# Altium PCB ToF_Sensor.PcbDoc
Units mm, origin at the board's own origin, x right, y up, seen from the top; angles counter-clockwise.
Board outline 10.8 x 10.2 mm, 2 copper layers (Top Layer, Bottom Layer); 15 components, 9 nets, 57 pads, 24 vias.
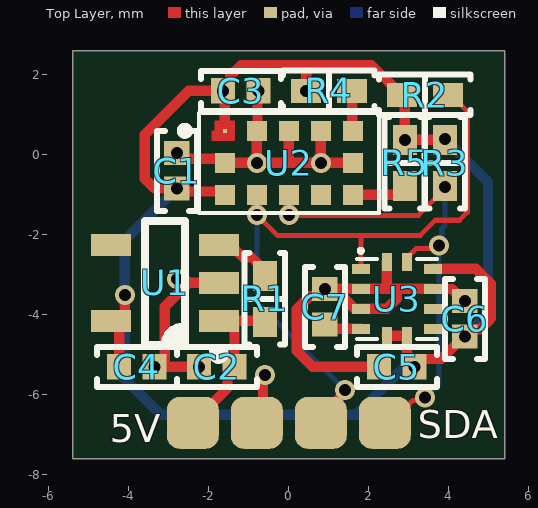
[diagram p0: Top Layer view]
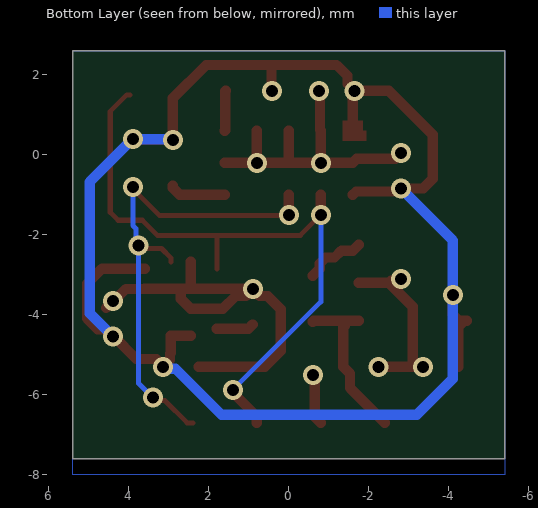
[diagram p1: Bottom Layer view, seen from below]

## Layer stack, top to bottom
Top Solder: solder mask 0.0102, Solder Resist, Dk 3.5
Top Layer: signal copper 0.0356
Dielectric 1: dielectric 0.32, FR-4, Dk 4.8
Bottom Layer: signal copper 0.0356
Bottom Solder: solder mask 0.0102, Solder Resist, Dk 3.5

## Board outline
-5.4,-7.6 -5.4,2.6 5.4,2.6 5.4,-7.6

## Design rules (kind name [scope] priority, off if disabled: settings)
BoardOutlineClearance [All] p1: gap=0.2 ignorepadtopadclearanceinfootprint=FALSE
Clearance "PolyGon Pour Clearance" [InPolygon] p1: gap=0.2 ignorepadtopadclearanceinfootprint=FALSE
Clearance [All] p2: gap=0.2 ignorepadtopadclearanceinfootprint=TRUE except(0: Arc-Hole Track-Hole SMDPad-Hole THPad-Hole Via-Hole Fill-Hole Poly-Hole Region-Hole Text-Hole)
HoleSize [All] p1: absolutevalues=TRUE maxlimit=6.3 minlimit=0.02 maxpercent=80.000 minpercent=20.000
PolygonConnect PolygonRelief [IsPolygon and not (IsNamedPolygon('PolygonDirect'))] p1: thpad.connectstyle=Relief thpad.reliefconductorwidth=0.254 thpad.reliefentries=4 thpad.polygonreliefangle="90 Angle" thpad.airgapwidth=0.254 smdpad.connectstyle=Relief smdpad.reliefconductorwidth=0.254 smdpad.reliefentries=4 smdpad.polygonreliefangle="90 Angle" smdpad.airgapwidth=0.254 via.connectstyle=Direct via.reliefconductorwidth=0.254 via.reliefentries=4 via.polygonreliefangle="90 Angle" via.airgapwidth=0.254
PolygonConnect [All] p2: connectstyle=Direct reliefconductorwidth=0.254 reliefentries=4 polygonreliefangle="90 Angle" airgapwidth=0.254
RoutingVias [All] p1: holewidth=0.3 width=0.5 viastyle="Through Hole" minholewidth=0.3 minwidth=0.5 maxholewidth=0.7 maxwidth=1.27
SolderMaskExpansion [All] p1: expansion=0.102 istentingtop=FALSE
Width [All] p1: maxlimit=0.712 minlimit=0.127 preferedwidth=0.254
29 further rules are at their usual default settings.

## Components (designator, comment, footprint, x,y, rotation, side; value= is the part's Value field where it differs from the comment)
C1 "0.1 µF" "CAP 0402_1005" -2.8,-0.4 r270 top
C2 "0.1 µF" "CAP 0402_1005" -1.8,-5.3 r0 top
C3 "0.1 µF" "CAP 0402_1005" -1.2,1.6 r180 top
C4 "1 µF" "CAP 0402_1005" -3.8,-5.3 r180 top
C5 "1 µF" "CAP 0402_1005" 2.7,-5.3 r180 top
C6 "0.1 µF" "CAP 0402_1005" 4.4,-4.1 r90 top
C7 "0.1 µF" "CAP 0402_1005" 0.9,-3.8 r90 top
R1 "10k Ohms" "RES 0402_1005" -0.6,-3.6 r270 top
R2 "10k" "RES 0402_1005" 3.4,1.5 r0 top
R3 "10k" "RES 0402_1005" 3.9,-0.2 r270 top
R4 "10k" "RES 0402_1005" 1,1.6 r0 top
R5 "10k" "RES 0402_1005" 2.9,-0.2 r270 top
U1 "MIC5504" "TI SOT-23-5 DBV" -3.1,-3.2 r180 top
U2 "VL53L3CXV0DH/1" XDCR_VL53L3CXV0DH/1 0,-0.2 r0 top
U3 "LIS3MDL" LGA12_ST 2.7,-3.6 r0 top

## Footprints (in the part's own frame and the unit in brackets; to place one, negate y for a bottom-side part, rotate by r counter-clockwise, add the part's x,y. Pads: shape width x height; smd on the part's side, far side on the other; paste and mask are expansions set on the pad)
"CAP 0402_1005" [mm] "Chip Capacitor, 2-Leads, Body 1.02x0.51mm, IPC Medium Density"
  rect 0.6x0.64 smd: 1(-0.44,0) 2(0.44,0)
  silkscreen extent -1,-0.5 1,0.5, body extent -0.5,-0.26 0.5,0.26, height 0.52
LGA12_ST [mm]
  rect 0.45x0.25 smd: 1(-0.9,0.75) 2(-0.9,0.25) 3(-0.9,-0.25) 4(-0.9,-0.75) 7(0.9,-0.75) 8(0.9,-0.25) 9(0.9,0.25) 10(0.9,0.75)
  rect 0.25x0.45 smd: 5(-0.25,-0.925) 6(0.25,-0.925) 11(0.25,0.925) 12(-0.25,0.925)
  silkscreen extent -1,-1 1,1.25, body extent -1,-1 1,1, height 0.25
"RES 0402_1005" [mm] "Chip Resistor, 2-Leads, Body 1.0x0.5mm, IPC Medium Density"
  rect 0.75x0.6 smd: 1(-0.575,0) 2(0.575,0)
  silkscreen extent -1.14,-0.51 1.14,0.51, body extent -0.5,-0.25 0.5,0.25, height 0.35
"TI SOT-23-5 DBV" [mm] "SOT23, 5-Leads, Body 2.90x2.80mm, Pitch 0.95mm, IPC Medium Density"
  rect 1x0.55 smd: 1(-1.35,0.95) 2(-1.35,0) 3(-1.35,-0.95) 4(1.35,-0.95) 5(1.35,0.95)
  silkscreen extent -1.48,-1.55 0.5,1.9, body extent -1.44,-1.43 1.39,1.48, height 1.5
XDCR_VL53L3CXV0DH/1 [mm]
  rect 0.1x0.1 smd paste-1 mask+0: 1(-1.6,0.8)
  rect 0.5x0.5 smd: 2(-0.8,0.8) 3(0,0.8) 4(0.8,0.8) 5(1.6,0.8) 6(1.6,0) 7(1.6,-0.8) 8(0.8,-0.8) 9(0,-0.8) 10(-0.8,-0.8) 11(-1.6,-0.8) 12(-1.6,0)
  Top Layer region: -1.35,0.55 -1.93,0.55 -1.93,0.8 -1.85,0.8 -1.85,1.05 -1.35,1.05
  silkscreen extent -2.7,-1.25 2.25,1.25, body extent -2.2,-1.2 2.2,1.2, height 1.05

## Part data
C1 C2 C3 C6 C7: library part C0402C104K4RACAUTO, "CAP CER 0.1UF 16V X7R 0402", Device Package="0402 (1005 Metric)", Manufacturer=KEMET, Operating Temperature="-55°C ~ 125°C", Ratings=AEC-Q200, Supplier Part Number 1=399-6828-1-ND, Temperature Coefficient=X7R, Tolerance=±10%, Voltage - Rated=16V, Applications="Automotive, Bypass, Decoupling", Capacitance="0.1 µF", ComponentLink1Description=Datasheet, ComponentLink1URL=https://api.kemet.com/component-edge/download/specsheet/C0402C104K4RACAUTO.pdf, ComponentLink2Description="DigiKey Link", ComponentLink2URL=https://www.digikey.com/en/products/detail/kemet/C0402C104K4RACAUTO/3314827, LastUpdated="8/14/2022 9:05:51 PM", Lifecycle Status=Active, Minimum Order=1, Mounting Type="Surface Mount, MLCC", Package / Case="0402 (1005 Metric)", Packaging=TapeAndReel, Part Number=C0402C104K4RACAUTO, Part Status=Active, PartId=3024, Price=0.01, Series="SMD Auto X7R", Size / Dimension="0.039\" L x 0.020\" W (1.00mm x 0.50mm)", Supplier 1=DigiKey, Thickness (Max)="0.022\" (0.55mm)"
C4 C5: library part C0402C104K4RACAUTO, "CAP CER 0.1UF 16V X7R 0402", Capacitance="0.1 µF", Device Package="0402 (1005 Metric)", Manufacturer=KEMET, Operating Temperature="-55°C ~ 125°C", Ratings=AEC-Q200, Supplier Part Number 1=399-6828-1-ND, Temperature Coefficient=X7R, Tolerance=±10%, Voltage - Rated=16V, Applications="Automotive, Bypass, Decoupling", ComponentLink1Description=Datasheet, ComponentLink1URL=https://api.kemet.com/component-edge/download/specsheet/C0402C104K4RACAUTO.pdf, ComponentLink2Description="DigiKey Link", ComponentLink2URL=https://www.digikey.com/en/products/detail/kemet/C0402C104K4RACAUTO/3314827, LastUpdated="8/14/2022 9:05:51 PM", Lifecycle Status=Active, Minimum Order=1, Mounting Type="Surface Mount, MLCC", Package / Case="0402 (1005 Metric)", Packaging=TapeAndReel, Part Number=C0402C104K4RACAUTO, Part Status=Active, PartId=3024, Price=0.01, Series="SMD Auto X7R", Size / Dimension="0.039\" L x 0.020\" W (1.00mm x 0.50mm)", Supplier 1=DigiKey, Thickness (Max)="0.022\" (0.55mm)"
R1 R2 R3 R4 R5: library part CRCW0402330RJNEDC, "RES 330 OHM 5% 1/16W 0402", Device Package="0402 (1005 Metric)", Manufacturer="Vishay Dale", Operating Temperature="-55°C ~ 155°C", Power (Watts)="0.063W, 1/16W", Resistance="330 Ohms", Supplier Device Package=0402, Supplier Part Number 1=541-4123-1-ND, Temperature Coefficient=±200ppm/°C, Tolerance=±5%, ComponentLink1Description=Datasheet, ComponentLink1URL=http://www.vishay.com/docs/28773/crcwce3.pdf, ComponentLink2Description="DigiKey Link", ComponentLink2URL=https://www.digikey.com/en/products/detail/vishay-dale/CRCW0402330RJNEDC/7928545, Composition="Thick Film", Height - Seated (Max)="0.014\" (0.35mm)", LastUpdated="8/14/2022 9:23:31 PM", Lifecycle Status=Active, Minimum Order=1, Number of Terminations=2, Package / Case="0402 (1005 Metric)", Packaging=CutTape, Part Number=CRCW0402330RJNEDC, Part Status=Active, PartId=15989, Price=0.01, Series=CRCW-C, Size / Dimension="0.039\" L x 0.020\" W (1.00mm x 0.50mm)", Supplier 1=DigiKey
U1: library part MIC5504-3.3YM5, "3.3V LDO"
U2: "Optical Sensor 118.110 (3m) I2C Output", Package=None, Availability=Unavailable, MF=STMicroelectronics, MP=VL53L3CXV0DH/1, Price=None, SnapEDA_Link=https://www.snapeda.com/parts/VL53L3CXV0DH/1/STMicroelectronics/view-part/4775788/?ref=snap
U3: "Magnetometer"

## Free pads (board coordinates)
  rrect50% 1.3x1.3 smd: 1(-2.4,-6.7) 2(-0.8,-6.7) 3(0.8,-6.7) 4(2.4,-6.7)

## Via types
v1: diameter 0.5, hole 0.3, Top Layer to Bottom Layer, tented both sides, 24 vias

## Nets (pads, with @x,y where several pads share a name; then routed paths per layer and width w, separated by ;. In a path a pad name is that pad's centre, name@x,y a point inside that pad or via, vN(x,y) a via of type N, cw(c..) or ccw(c..) an arc to the next point about the centre after c; other vN are vias at no path point)
3V3: C1.2 C3.2 C4.2 C5.1 C6.1 R2.1 R3.1 R4.1 R5.1 U1.5 U2.1 U2.11 U3.5 U3.6 U3.10 | length 43.1
  Top Layer w0.254: U1.5 U1.5@-4.388,-4.15 ; C4.2 -4.24,-4.298 U1.5@-4.388,-4.15 ; v1(-4.1,-3.5) -4.1,-4.002 -4.248,-4.15 U1.5@-4.388,-4.15 ; U2.11 -1.68,-0.92 -2.72,-0.92 v1(-2.8,-0.84) -3.36,-0.84 -3.6,-0.6 -3.6,0.5 -2.5,1.6 v1(-1.64,1.6) ; U2.1 -1.6,1.56 v1(-1.64,1.6) ; v1(0.425,1.6) 0.435,1.61 0.435,2.247 ; U3.5 U3.6 2.95,-4.958 2.967,-4.975 2.967,-5.127 v1(3.14,-5.3) 3.14,-5.28 3.313,-5.107 3.813,-5.107 4.38,-4.54 v1(4.4,-4.54) ; U3.10@3.602,-2.852 U3.10 4.672,-2.85 5.047,-3.225 5.047,-4.095 4.775,-4.367 4.573,-4.367 v1(4.4,-4.54) ; R3.1 v1(2.9,0.375) 2.9,1.412 2.065,2.247 0.435,2.247 ; C6.1@4.408,-4.548 v1(4.4,-4.54) ; v1(-1.64,1.6) -1.467,1.773 -1.467,1.975 -1.195,2.247 0.435,2.247
  Bottom Layer w0.254: v1(-2.8,-0.84) -4.1,-2.14 v1(-4.1,-3.5) -4.1,-5.6 -3.2,-6.5 1.681,-6.5 2.833,-5.347 3.093,-5.347 v1(3.14,-5.3) ; v1(2.9,0.375) 2.912,0.387 3.888,0.387 v1(3.9,0.4) 4.977,-0.677 4.977,-3.963 v1(4.4,-4.54)
5V: C2.2 pad.1 R1.2 U1.1 | length 4.2
  Top Layer w0.254: pad.1 -1.533,-5.833 -1.533,-5.473 C2.2 -1.36,-4.315 -1.4,-4.275 U1.1@-1.4,-4.15 ; U1.1 U1.1@-1.4,-4.15 ; R1.2 -0.625,-4.15 U1.1@-1.4,-4.15
GND: C1.1 C2.1 C3.1 C4.1 C5.2 C6.2 C7.2 pad.2 U1.2 U2.2 U2.3 U2.4 U2.6 U2.12 U3.2 U3.3 U3.9 U3.12 | length 24.9
  Top Layer w0.254: v1(-3.36,-5.3) C4.1@-3.1,-5.3 ; v1(-2.8,-3.1) -2.753,-3.147 -2.553,-3.147 -2.5,-3.2 ; v1(-2.8,0.04) -2.66,-0.1 -1.7,-0.1 U2.12 v1(-0.8,-0.2) ; v1(-2.24,-5.3) C4.1@-3.1,-5.3 ; U1.2 -2.5,-3.2 ; pad.2 -0.647,-6.547 -0.647,-5.547 v1(-0.6,-5.5) ; v1(-0.76,1.6) -0.78,1.58 -0.78,0.62 U2.2 v1(-0.8,-0.2) ; U2.3 0,-0.2 ; U2.4 v1(0.8,-0.2) ; U2.6 v1(0.8,-0.2) ; C5.2 0.6,-5.3 0.2,-4.9 0.2,-3.858 0.525,-3.533 0.727,-3.533 v1(0.9,-3.36) ; U3.12 2.45,-3.3 2.4,-3.35 ; C6.2@4.573,-3.833 v1(4.4,-3.66) 4.38,-3.66 4.072,-3.352 3.602,-3.352 U3.9 2.7,-3.35 ; C4.1@-3.1,-5.3 -3.1,-3.8 -2.5,-3.2 ; v1(-0.8,-0.2) 0,-0.2 ; 0,-0.2 v1(0.8,-0.2) ; v1(0.9,-3.36) 0.91,-3.35 U3.2 2.4,-3.35 ; v1(0.9,-3.36) 1.073,-3.533 1.333,-3.533 1.65,-3.85 2.45,-3.85 2.7,-3.6 2.7,-3.35 ; 2.4,-3.35 2.7,-3.35
GPIO1: R5.2 U2.7 | length 1.4
  Top Layer w0.254: U2.7 2.727,-1 2.9,-0.827 R5.2
NetC7_1: C7.1 U3.4 | length 0.9
  Top Layer w0.254: C7.1 1.008,-4.348 1.798,-4.348 U3.4
NetR1_1: R1.1 U1.3 | length 1.5
  Top Layer w0.254: U1.3 -1.602,-2.398 -1.315,-2.398 -1.144,-2.568 -0.922,-2.568 -0.773,-2.717 -0.773,-2.852 R1.1
SCL: pad.3 R2.2 U2.10 U3.1 | length 16.6
  Top Layer w0.127: v1(-0.8,-1.5) -0.287,-2.013 1.8,-2.013 ; U3.1 1.8,-2.013 ; R2.2 4.05,1.5 4.463,1.087 4.463,-1.437 4.264,-1.636 3.664,-1.636 3.287,-2.013 1.8,-2.013
  Top Layer w0.254: v1(-0.8,-1.5) U2.10 ; pad.3 0.8,-6.544 1.4,-5.944 v1(1.4,-5.877)
  Bottom Layer w0.127: v1(-0.8,-1.5) -0.8,-3.677 v1(1.4,-5.877)
SDA: pad.4 R3.2 U2.9 U3.11 | length 12.5
  Top Layer w0.127: v1(0,-1.5) 0.014,-1.513 3.236,-1.513 3.9,-0.85 R3.2 ; pad.4 2.542,-6.7 3.1,-6.141 3.329,-6.141 v1(3.4,-6.07) ; U3.11 2.95,-2.575 3.185,-2.34 3.686,-2.34 v1(3.753,-2.273)
  Top Layer w0.254: v1(0,-1.5) U2.9
  Bottom Layer w0.127: v1(3.4,-6.07) 3.753,-5.717 v1(3.753,-2.273) 3.825,-2.202 3.825,-1.844 3.9,-1.769 v1(3.9,-0.8)
XSHUT: R4.2 U2.5 | length 1
  Top Layer w0.254: R4.2 1.587,1.587 1.587,0.613 U2.5
pads on no net: U1.4 U2.8 U3.7 U3.8

## Polygon pours and split planes (outlines as drawn)
GND on Bottom Layer "NONET_L02_P000" (solid, shelved, pour order 0): -5.4,2.6 -5.4,-8 5.4,-8 5.4,2.6

## Keep-outs
Keep-Out Layer:
  rectangle: 5.4,9 6.8,9.7
  rectangle: -6.8,6.5 -5.5,9.7
  rectangle: -5.6,4.572 5.6,9.6

## Silkscreen, mask and mechanical layers (free items; w line width, h text height)
Top Overlay:
  text "SDA" at 3.22,-7.08 h0.7
  text "5V" at -4.48,-7.18 h0.7
Board:
  the board outline again, w0.254